# EAGLE board IR_Vero (EAGLE 7.7.0)
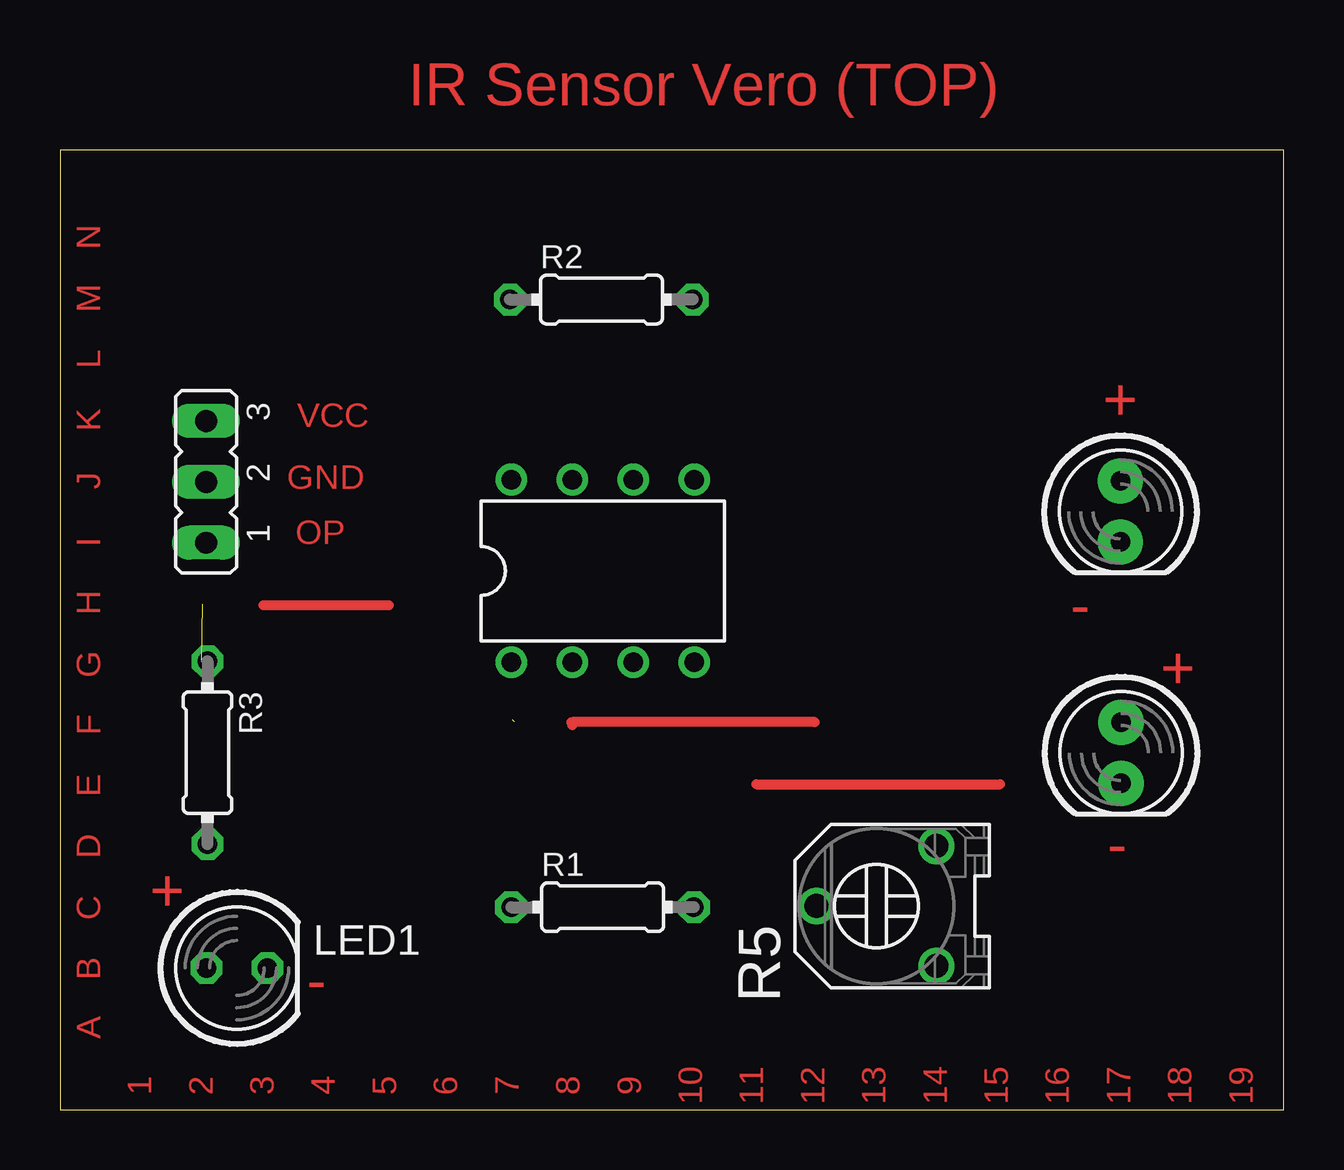
[diagram p0: board, top side]
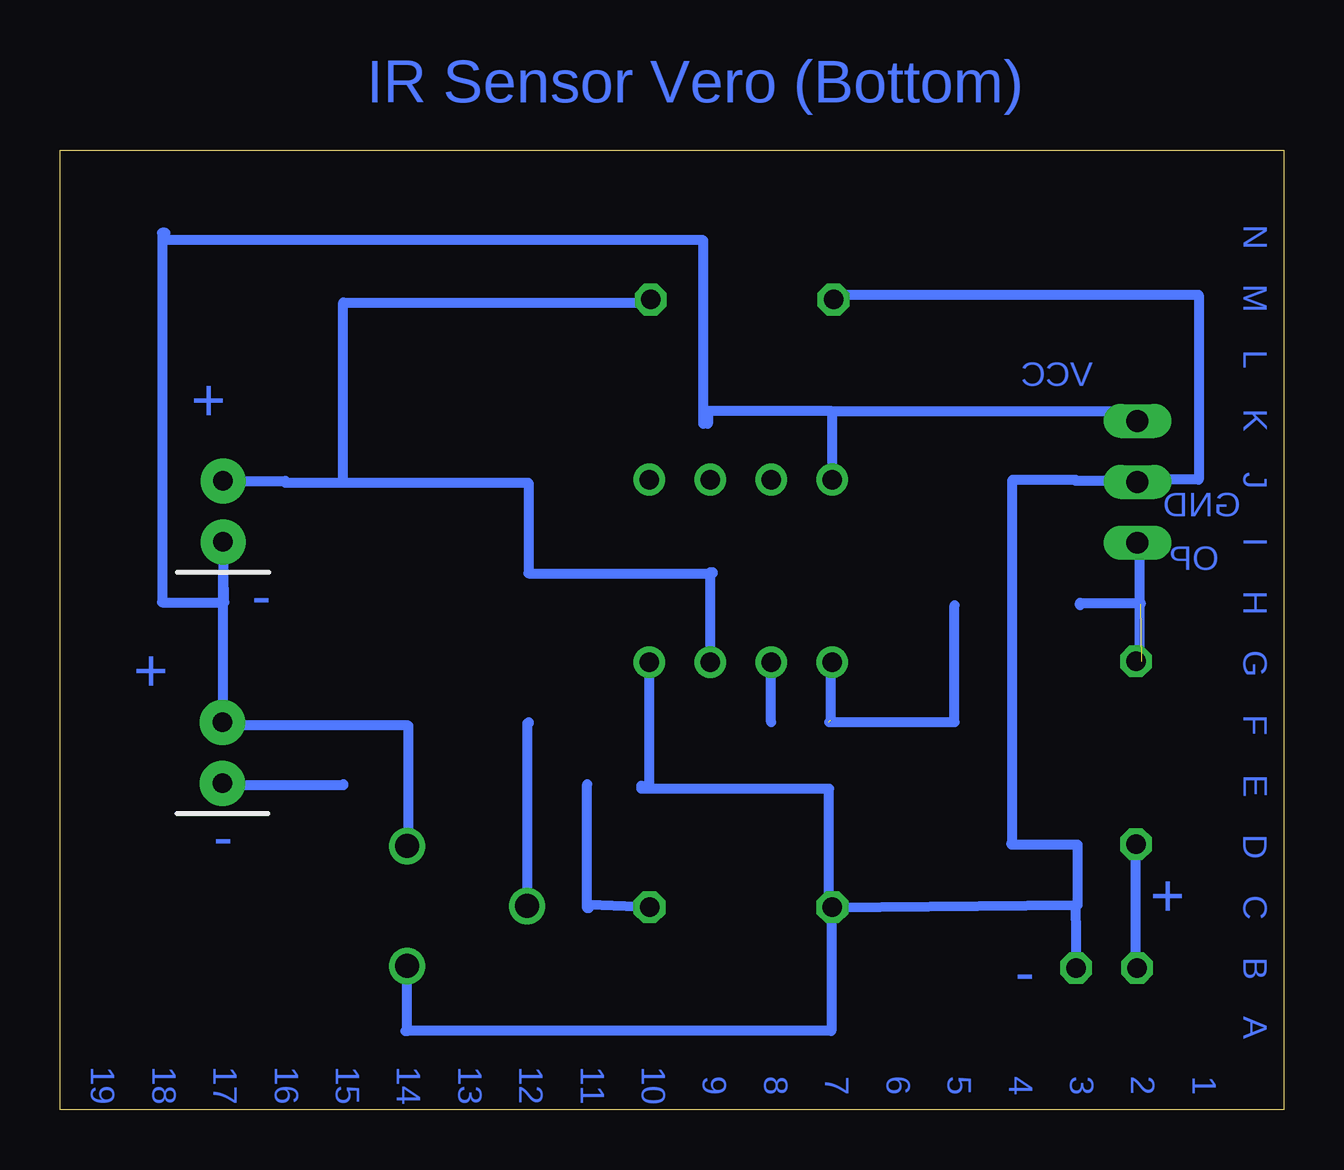
[diagram p1: board, bottom side, seen from below]

Size 51 x 40 mm. Coordinates in mm from the lower left corner, seen from the top.
Outline: 0,0 51,0 51,40 0,40 0,0
Copper layers (1*16): Top 0.035mm / dielectric 1.5mm / Bottom 0.035mm
Design rules "default": minimum track width 10mil, minimum drill 24mil, track to track 8mil, track to pad 8mil, pad to pad 8mil, via to via 8mil, smd to smd 8mil, copper to edge 40mil, drill to drill 8mil, minimum pad ring 10mil, minimum via ring 8mil, stop-mask expansion 4mil, vias tented up to drill 0mil, thermal gap 10mil

## Footprints (pad centres in the part's own frame; a part is rotated, then mirrored left to right if it is on the bottom)
LED_5MM = drill 0.813 pad 1.88: A -1.27,0; K 1.27,0
DIL08 = drill 0.813 pad 1.27: 1 -3.81,-3.81; 2 -1.27,-3.81; 3 1.27,-3.81; 4 3.81,-3.81; 5 3.81,3.81; 6 1.27,3.81; 7 -1.27,3.81; 8 -3.81,3.81
JP2 = drill 0.914 long: 1 -2.54,0; 2 0,0; 3 2.54,0
LED5MM = drill 0.813 octagon: A -1.27,0; K 1.27,0
0204/7 = drill 0.813 octagon: 1 -3.81,0; 2 3.81,0
TRIMMER_3306F = drill 1: 1 -2.5,-2.5; 2 0,2.5; 3 2.5,-2.5

## Placement (x,y rotation side)
1  [1X14]  3.54,19.86 90 top
2  [1X14]  6.08,19.86 90 top
4  [1X14]  11.16,19.86 90 top
D1  IR TX  [LED_5MM]  44.23,14.87 270 top
D2  IR RX  [LED_5MM]  44.2,24.94 270 top
IC1  LM358N  [DIL08]  22.63,22.45 0 top
JP1  [JP2]  6.09,26.17 90 top
JP3  [1X14]  8.62,19.86 90 top
JP5  [1X14]  13.7,19.86 90 top
JP6  [1X14]  16.24,19.86 90 top
JP7  [1X14]  18.78,19.86 90 top
JP8  [1X14]  21.32,19.86 90 top
JP9  [1X14]  23.86,19.86 90 top
JP10  [1X14]  26.4,19.86 90 top
JP11  [1X14]  28.94,19.86 90 top
JP12  [1X14]  31.48,19.86 90 top
JP13  [1X14]  34.02,19.86 90 top
JP14  [1X14]  36.56,19.86 90 top
JP15  [1X14]  39.1,19.86 90 top
JP16  [1X14]  41.64,19.86 90 top
JP17  [1X14]  44.18,19.86 90 top
JP18  [1X14]  46.72,19.86 90 top
JP19  [1X14]  49.26,19.86 90 top
LED1  [LED5MM]  7.37,5.9 0 top
R1  330  [0204/7]  22.62,8.44 0 top
R2  10K  [0204/7]  22.57,33.77 0 top
R3  330  [0204/7]  6.15,14.88 270 top
R5  10k  [TRIMMER_3306F]  34.03,8.48 90 top

## Library data of the parts
1 2 4 JP3 JP5-JP19 = pinhead_1x14_no_frame MOD
D1 = SparkFun-LED
D2 = SparkFun-LED; OC_FARNELL: unknown; OC_NEWARK: unknown
IC1 = linear
JP1 = jumper
LED1 = led
R1-R3 = eagle-ltspice
R5 = dp_devices.v6

## Nets
N$1: D1.A D2.K IC1.8 JP1.3 R5.3
N$2: D1.K R1.2
N$3: IC1.4 JP1.2 LED1.K R1.1 R2.1 R5.1
N$6: IC1.2 R5.2
N$7: D2.A IC1.3 R2.2

## Tracks (layer width: path | path; a pad name or v marks a point on that pad's centre or on a via)
N$1
  Bottom 0.406: 18.82,29.11 IC1.8 | 18.82,29.11 23.99,29.11 23.99,28.59 24.18,28.59 24.18,36.24 46.61,36.24 46.61,36.55 46.75,36.55 46.75,21.14 44.15,21.14 D2.K 44.23,21.13 D1.A 44.23,16.01 36.47,16.01 36.47,10.98 R5.3 | 18.82,29.11 6.09,29.11 JP1.3
N$2
  Top 0.406: 29.02,13.56 39.2,13.56
  Bottom 0.406: R1.2 28.95,8.53 28.95,8.4 29.02,8.4 29.02,13.56 | 39.2,13.56 39.2,13.52 44.23,13.52 D1.K
N$3
  Bottom 0.406: 8.69,8.53 LED1.K | 8.69,8.53 R1.1 18.84,8.53 | 18.84,8.53 18.84,3.28 36.53,3.28 | 36.61,3.28 36.53,3.28 | 36.53,3.28 R5.1 | 18.84,8.53 18.94,8.53 18.94,13.37 26.77,13.37 26.77,13.5 26.44,13.5 IC1.4 | 8.69,8.53 8.58,8.53 8.58,11.04 11.34,11.04 11.34,11.12 11.3,11.12 11.3,26.26 8.67,26.26 8.67,26.22 6.09,26.22 JP1.2 6.09,26.26 3.54,26.26 3.54,33.96 18.76,33.96 R2.1
N$6
  Top 0.406: 31.47,16.15 21.36,16.15 | 21.36,16.15 21.36,16.03 | 21.3,16.15 21.36,16.15
  Bottom 0.406: R5.2 31.52,8.48 31.52,16.1 31.47,16.1 31.47,16.15 | 21.36,16.15 IC1.2
N$7
  Bottom 0.406: D2.A 41.6,26.21 41.6,26.13 39.19,26.13 | 39.19,26.13 39.19,33.64 26.33,33.64 R2.2 | 39.19,26.13 31.47,26.13 31.47,22.36 23.78,22.36 23.78,22.39 23.9,22.39 IC1.3
S$1
  Bottom 0.406: 6.04,5.91 6.15,5.91 6.15,11.08
S$3  (2 unrouted)
  Top 0.406: 13.71,21.02 8.49,21.02
  Bottom 0.406: 18.94,16.15 13.71,16.15 13.71,21.02 | 8.49,21.02 8.49,21.12 5.95,21.12 5.95,21.07 | 18.86,16.25 18.86,18.7 | 5.91,18.67 5.99,18.67 5.99,23.67

## Text on the board
Top: IR Sensor Vero (TOP) | N | M | L | K | + | VCC | J | GND | I | OP | H | - | G | + | F | E | D | - | C | + | B | - | A | 1 / 2 / 3 / 4 / 5 / 6 / 7 / 8 / 9 / 10 / 11 / 12 / 13 / 14 / 15 / 16 / 17 / 18 / 19
Bottom: IR Sensor Vero (Bottom) | N | M | L | VCC | K | + | J | GND | I | OP | H | - | G | + | F | E | D | - | C | + | B | - | A | 1 / 2 / 3 / 4 / 5 / 6 / 7 / 8 / 9 / 10 / 11 / 12 / 13 / 14 / 15 / 16 / 17 / 18 / 19